# EAGLE board CT_schematic (EAGLE 7.6.0)

Size 100 x 80 mm. Coordinates in mm from the lower left corner, seen from the top.
Outline: 0,0 100,0 100,80 0,80 0,0
Copper layers (1*16): Top 0.035mm / dielectric 1.5mm / Bottom 0.035mm
Design rules "default": minimum track width 10mil, minimum drill 24mil, track to track 8mil, track to pad 8mil, pad to pad 8mil, via to via 8mil, smd to smd 8mil, copper to edge 40mil, drill to drill 8mil, minimum pad ring 10mil, minimum via ring 8mil, stop-mask expansion 4mil, vias tented up to drill 0mil, thermal gap 10mil

## Footprints (pad centres in the part's own frame; a part is rotated, then mirrored left to right if it is on the bottom)
C0603 = smd 0.8 x 0.8: 1 -0.762,0; 2 0.762,0
C0402 = smd 0.5 x 0.5: 1 -0.508,0; 2 0.508,0
C1206 = smd 1.3 x 1.6: 1 -1.524,0; 2 1.524,0
C0805 = smd 1.2 x 1.3: 1 -1.016,0; 2 1.016,0
C1210 = smd 1.2 x 2.5: 1 -1.524,0; 2 1.524,0
EXV-9H = smd 3.505 x 1.676: 1 -2.857,0; 2 2.857,0
L0603 = smd 0.8 x 0.8: 1 -0.762,0; 2 0.762,0
PJ-037B_PACKAGE = drill 3.7 square: 1 12,0 | drill 3.2 square: 2 6,0
R0603 = smd 0.8 x 0.8: 1 -0.762,0; 2 0.762,0
LQFP64 = smd 0.3 x 1.2: 1 -3.75,-5.75; 2 -3.25,-5.75; 3 -2.75,-5.75; 4 -2.25,-5.75; 5 -1.75,-5.75; 6 -1.25,-5.75; 7 -0.75,-5.75; 8 -0.25,-5.75; 9 0.25,-5.75; 10 0.75,-5.75; 11 1.25,-5.75; 12 1.75,-5.75; 13 2.25,-5.75; 14 2.75,-5.75; 15 3.25,-5.75; 16 3.75,-5.75; 33 3.75,5.75; 34 3.25,5.75; 35 2.75,5.75; 36 2.25,5.75; 37 1.75,5.75; 38 1.25,5.75; 39 0.75,5.75; 40 0.25,5.75; 41 -0.25,5.75; 42 -0.75,5.75; 43 -1.25,5.75; 44 -1.75,5.75; 45 -2.25,5.75; 46 -2.75,5.75; 47 -3.25,5.75; 48 -3.75,5.75 | smd 1.2 x 0.3: 17 5.75,-3.75; 18 5.75,-3.25; 19 5.75,-2.75; 20 5.75,-2.25; 21 5.75,-1.75; 22 5.75,-1.25; 23 5.75,-0.75; 24 5.75,-0.25; 25 5.75,0.25; 26 5.75,0.75; 27 5.75,1.25; 28 5.75,1.75; 29 5.75,2.25; 30 5.75,2.75; 31 5.75,3.25; 32 5.75,3.75; 49 -5.75,3.75; 50 -5.75,3.25; 51 -5.75,2.75; 52 -5.75,2.25; 53 -5.75,1.75; 54 -5.75,1.25; 55 -5.75,0.75; 56 -5.75,0.25; 57 -5.75,-0.25; 58 -5.75,-0.75; 59 -5.75,-1.25; 60 -5.75,-1.75; 61 -5.75,-2.25; 62 -5.75,-2.75; 63 -5.75,-3.25; 64 -5.75,-3.75
A2200-A = smd 1.5 x 0.8: 1 -4.85,6.35; 2 -4.85,5.08; 3 -4.85,3.81; 4 -4.85,2.54; 5 -4.85,1.27; 6 -4.85,0; 7 -4.85,-1.27; 8 -4.85,-2.54; 9 -4.85,-3.81; 10 -4.85,-5.08; 11 -4.85,-6.35; 12 4.85,-6.35; 13 4.85,-5.08; 14 4.85,-3.81; 15 4.85,-2.54; 16 4.85,-1.27; 17 4.85,0; 18 4.85,1.27; 19 4.85,2.54; 20 4.85,3.81; 21 4.85,5.08; 22 4.85,6.35 | smd 1.2 x 1.2: 23 -2,2; 24 -2,0; 25 -2,-2; 26 0,-2; 27 0,0; 28 0,2; 29 2,2; 30 2,0; 31 2,-2
COAXIAL_C = smd 1 x 1: 1 0,-1.5; 2 0,1.5 | smd 1.05 x 2.2: 3 -1.475,0; 4 1.475,0
QFN-32 = smd 0.6 x 0.3: 1 -2.3,1.75; 2 -2.3,1.25; 3 -2.3,0.75; 4 -2.3,0.25; 5 -2.3,-0.25; 6 -2.3,-0.75; 7 -2.3,-1.25; 8 -2.3,-1.75; 17 2.3,-1.75; 18 2.3,-1.25; 19 2.3,-0.75; 20 2.3,-0.25; 21 2.3,0.25; 22 2.3,0.75; 23 2.3,1.25; 24 2.3,1.75 | smd 0.3 x 0.6: 9 -1.75,-2.3; 10 -1.25,-2.3; 11 -0.75,-2.3; 12 -0.25,-2.3; 13 0.25,-2.3; 14 0.75,-2.3; 15 1.25,-2.3; 16 1.75,-2.3; 25 1.75,2.3; 26 1.25,2.3; 27 0.75,2.3; 28 0.25,2.3; 29 -0.25,2.3; 30 -0.75,2.3; 31 -1.25,2.3; 32 -1.75,2.3 | smd 3.2 x 3.2: EXP 0,0
SJ-43515TS-SMT-TR = smd 2.2 x 3: 1 0.6,-7.4; 4 3.4,-7.4 | smd 3 x 3: 2 12.8,-7.4; 5 17,-3 | smd 2 x 3: 3 5.3,0; 6 2.5,0 | drill 1.8: P$7 4.5,-3.69; P$8 11.54,-3.69
WM-64PC = drill 0.6 pad 1: 1 -1,0.95; 2 -1,-0.95
MICRO_USB_AB = smd 0.4 x 1.35: 1 1.3,0.26; 2 0.65,0.26; 3 0,0.26; 4 -0.65,0.26; 5 -1.3,0.26 | drill 0.6 pad 0.95 long: 6 4.175,-2.54; 7 -4.175,-2.54 | drill 0.7 pad 1.1 long: 8 -2.225,0.46; 9 2.225,0.46
SOT143B = smd 1 x 0.7: 1 -0.75,-1 | smd 0.6 x 0.7: 2 0.95,-1; 3 0.95,1; 4 -0.95,1
ABS07-32.768KHZ-7-T = smd 1.1 x 2.4: 1 -2.5,0; 2 0,0
ASFL1 = smd 1.7 x 1.5: 1 -1.27,-1.1; 2 1.27,-1.1; 3 1.27,1.1; 4 -1.27,1.1
WSON-8 = smd 0.3 x 0.6: 1 -0.75,0; 2 0.05,0; 3 0.85,0; 4 1.65,0; 5 1.65,3.8; 6 0.85,3.8; 7 0.05,3.8; 8 -0.75,3.8 | smd 3 x 2.6: PAD 0.45,1.9
SON-6 = smd 0.55 x 0.3: 1 -0.355,0.5 | smd 0.52 x 0.3: 2 -0.37,0; 3 -0.37,-0.5; 4 0.37,-0.5; 5 0.37,0; 6 0.37,0.5
SW_4-1437565-2 = smd 1.4 x 2.1: 1 -2.23,4.55; 2 -2.23,-4.55; 3 2.23,4.55; 4 2.23,-4.55
LGM67K-G1J2-24-Z = smd 0.8 x 1.4: A -2,0; C 0,0
NC7SZ125M5X = smd 1.3 x 0.7: 1 -1.3,0.95; 2 -1.3,0; 3 -1.3,-0.95; 4 1.3,-0.95; 5 1.3,0.95

## Placement (x,y rotation side)
C1  1e-07  [C0603]  -38.1,74.93 0 top  (outside the outline)
C2  1e-07  [C0603]  -41.91,74.93 0 top  (outside the outline)
C3  1e-07  [C0603]  -45.72,74.93 0 top  (outside the outline)
C4  1e-07  [C0603]  -49.53,74.93 0 top  (outside the outline)
C5  4.7e-06  [C0603]  -34.29,74.93 0 top  (outside the outline)
C6  1e-07  [C0603]  -53.34,74.93 0 top  (outside the outline)
C7  1e-08  [C0603]  -57.15,74.93 0 top  (outside the outline)
C8  1e-06  [C0603]  -60.96,74.93 0 top  (outside the outline)
C9  1e-11  [C0402]  -76.2,80.01 0 top  (outside the outline)
C10  1e-11  [C0402]  -80.01,80.01 0 top  (outside the outline)
C11  1e-07  [C0402]  -15.24,85.09 0 top  (outside the outline)
C12  1e-06  [C0603]  -64.77,74.93 0 top  (outside the outline)
C13  1e-06  [C0603]  -68.58,74.93 0 top  (outside the outline)
C14  1e-06  [C0603]  -72.39,74.93 0 top  (outside the outline)
C15  1e-06  [C0603]  -76.2,74.93 0 top  (outside the outline)
C16  1e-06  [C0603]  -80.01,74.93 0 top  (outside the outline)
C17  1e-06  [C0603]  -15.24,80.01 0 top  (outside the outline)
C18  1e-06  [C0603]  -19.05,80.01 0 top  (outside the outline)
C19  1e-07  [C0402]  -19.05,85.09 0 top  (outside the outline)
C20  1e-07  [C0402]  -22.86,85.09 0 top  (outside the outline)
C21  1e-07  [C0402]  -26.67,85.09 0 top  (outside the outline)
C22  1e-07  [C0402]  -30.48,85.09 0 top  (outside the outline)
C23  1e-06  [C0603]  -22.86,80.01 0 top  (outside the outline)
C24  1e-08  [C0402]  -34.29,85.09 0 top  (outside the outline)
C25  1e-08  [C0402]  -38.1,85.09 0 top  (outside the outline)
C26  1e-08  [C0402]  -41.91,85.09 0 top  (outside the outline)
C27  1e-05  [C1206]  -35.56,68.58 0 top  (outside the outline)
C28  1e-05  [C0805]  -59.69,68.58 0 top  (outside the outline)
C29  1e-08  [C0402]  -45.72,85.09 0 top  (outside the outline)
C30  1e-05  [C1206]  -41.91,68.58 0 top  (outside the outline)
C31  1e-05  [C1210]  -29.21,68.58 0 top  (outside the outline)
C32  1e-07  [C0402]  -49.53,85.09 0 top  (outside the outline)
C33  0.0001  [EXV-9H]  -45.72,59.69 0 top  (outside the outline)
C34  0.0001  [EXV-9H]  -57.15,59.69 0 top  (outside the outline)
C35  1e-08  [C0402]  -53.34,85.09 0 top  (outside the outline)
C36  1e-08  [C0402]  -57.15,85.09 0 top  (outside the outline)
F1  240.0  [L0603]  -26.67,80.01 0 top  (outside the outline)
J1  PJ-037B  [PJ-037B_PACKAGE]  -55.88,26.67 0 top  (outside the outline)
R2  1000.0  [R0603]  -30.48,80.01 0 top  (outside the outline)
R4  4700.0  [R0603]  -34.29,80.01 0 top  (outside the outline)
R5  4700.0  [R0603]  -38.1,80.01 0 top  (outside the outline)
R6  2200.0  [R0603]  -41.91,80.01 0 top  (outside the outline)
R7  2200.0  [R0603]  -45.72,80.01 0 top  (outside the outline)
R8  10000.0  [R0603]  -15.24,74.93 0 top  (outside the outline)
R9  10000.0  [R0603]  -20.32,74.93 0 top  (outside the outline)
R10  1270.0  [R0603]  -49.53,80.01 0 top  (outside the outline)
R11  1270.0  [R0603]  -53.34,80.01 0 top  (outside the outline)
R12  100000.0  [R0603]  -64.77,67.31 0 top  (outside the outline)
R13  200.0  [R0603]  -57.15,80.01 0 top  (outside the outline)
R14  1000.0  [R0603]  -60.96,80.01 0 top  (outside the outline)
R15  100000.0  [R0603]  -69.85,67.31 0 top  (outside the outline)
R16  2231.0  [R0603]  -64.77,80.01 0 top  (outside the outline)
R17  1000.0  [R0603]  -68.58,80.01 0 top  (outside the outline)
R18  10000.0  [R0603]  -25.4,74.93 0 top  (outside the outline)
R19  10000.0  [R0603]  -30.48,74.93 0 top  (outside the outline)
R20  9100.0  [R0603]  -72.39,80.01 0 top  (outside the outline)
R21  680000.0  [R0603]  -74.93,67.31 0 top  (outside the outline)
R22  120000.0  [R0603]  -80.01,67.31 0 top  (outside the outline)
U1  STM32L152RDT6  [LQFP64]  -68.58,26.67 0 top  (outside the outline)
U2  A2200-A  [A2200-A]  -19.05,10.16 0 top  (outside the outline)
U3  73412-0114  [COAXIAL_C]  -38.1,60.96 0 top  (outside the outline)
U4  SGTL5000XNAA3  [QFN-32]  -66.04,39.37 0 top  (outside the outline)
U5  SJ-43515TS-SMT-TR  [SJ-43515TS-SMT-TR]  -52.07,10.16 0 top  (outside the outline)
U6  SJ-43515TS-SMT-TR  [SJ-43515TS-SMT-TR]  -80.01,10.16 0 top  (outside the outline)
U7  SJ-43515TS-SMT-TR  [SJ-43515TS-SMT-TR]  -39.37,29.21 0 top  (outside the outline)
U8  WM-64PCT  [WM-64PC]  -52.07,39.37 0 top  (outside the outline)
U9  47590-0001  [MICRO_USB_AB]  -20.32,41.91 0 top  (outside the outline)
U10  prtr5v0u2ax  [SOT143B]  -69.85,85.09 0 top  (outside the outline)
U11  ABS07-32.768KHZ-7-T  [ABS07-32.768KHZ-7-T]  -78.74,59.69 0 top  (outside the outline)
U12  ASFL-24.57MHZ-NCS  [ASFL1]  -68.58,50.8 0 top  (outside the outline)
U13  ASFL1-25MHZ-NCS  [ASFL1]  -26.67,60.96 0 top  (outside the outline)
U14  LP3878SDX-ADJ/NOPB  [WSON-8]  -30.48,49.53 0 top  (outside the outline)
U15  LP3878SDX-ADJ/NOPB  [WSON-8]  -50.8,49.53 0 top  (outside the outline)
U16  TPS3895ADRYR  [SON-6]  -73.66,83.82 0 top  (outside the outline)
U17  4-1437565-2  [SW_4-1437565-2]  -40.64,40.64 0 top  (outside the outline)
U18  Q65110A2395  [LGM67K-G1J2-24-Z]  -17.78,68.58 0 top  (outside the outline)
U19  nc7sz125m5x  [NC7SZ125M5X]  -46.99,67.31 0 top  (outside the outline)
U20  nc7sz125m5x  [NC7SZ125M5X]  -53.34,67.31 0 top  (outside the outline)

## Library data of the parts
C1-C36 F1 J1 R2 R4-R22 U1-U20 = circuit_tree

## Nets
CLK_CRYSTAL_U1_3: C9.1 U1.3 U11.1
CLK_CRYSTAL_U1_4: C10.1 U1.4 U11.2
CLK_U1_5: U1.5 U13.3
CLK_U4_21: U4.21 U12.3
GND: C1.2 C2.2 C3.2 C4.2 C5.2 C6.2 C7.2 C8.2 C9.2 C10.2 C11.2 C19.2 C20.2 C21.2 C22.2 C23.2 C24.2 C25.2 C26.2 C27.2 C28.2 C29.2 C30.2 C31.2 C32.2 C33.2 C34.2 C35.2 C36.2 J1.2 R2.2 R8.2 R11.2 R14.2 R17.2 R20.2 R22.2 U1.12 U1.18 U1.31 U1.47 U1.63 U2.7 U2.8 U2.23 U2.24 U2.25 U2.26 U2.27 U2.28 U2.29 U2.30 U2.31 U4.1 U4.3 U4.7 U4.EXP U6.1 U7.1 U8.2 U9.5 U9.6 U9.7 U9.8 U9.9 U10.1 U12.2 U13.2 U14.3 U14.PAD U15.3 U15.PAD U16.2 U18.C U19.1 U19.3 U20.1 U20.3
NET_U1_1: C6.1 U1.1
NET_U1_7: R5.1 U1.7 U20.4
NET_U1_13: C7.1 C8.1 F1.1 U1.13
NET_U1_58: R6.1 U1.58 U2.15
NET_U1_59: R7.1 U1.59 U2.16
NET_U1_60: R8.1 U1.60
NET_U1_61: U18.A
NET_U1_62: U17.3 U17.4
NET_U2_2: R9.2 U2.2
NET_U2_6: U2.6
NET_U2_17: R9.1 U2.17
NET_U2_19: U2.19
NET_U2_22: R4.1 U2.22 U19.4
NET_U3_1: U2.11 U3.1
NET_U3_2: U2.10 U3.2 U3.3 U3.4
NET_U4_10: C22.1 U4.10
NET_U4_29: R10.1 U4.29
NET_U4_31: R11.1 U4.31
NET_U5_1: U4.4 U5.1
NET_U5_2: U4.2 U5.2
NET_U5_5: U4.6 U5.5
NET_U6_2: C13.1 U6.2
NET_U6_5: C12.1 U6.5
NET_U6_11: C13.2
NET_U6_12: C12.2
NET_U7_2: C15.1 C16.1 U7.2
NET_U7_5: C14.1 U7.5
NET_U7_13: C15.2 C16.2
NET_U7_14: C14.2
NET_U8_1: C17.1 C18.1 C23.1 U4.16 U8.1
NET_U8_15: C17.2 C18.2
NET_U10_4: U9.1 U10.4
NET_U14_1: C26.1 U14.1
NET_U14_6: R13.2 R14.1 U14.6
NET_U14_8: R12.1 U14.8
NET_U15_1: C29.1 U15.1
NET_U15_6: R16.2 R17.1 U15.6
NET_U15_8: R15.1 U15.8
NET_U16_1: R19.1 R20.1 U16.1
NET_U16_3: R21.2 R22.1 U16.3
NET_U16_4: R18.1 U16.4 U19.2 U20.2
NET_U17_1: R2.1 U17.1 U17.2
PROC_I2S2_CK: U1.34 U4.24
PROC_I2S2_SD: U1.36 U4.26
PROC_I2S2_WS: U1.33 U4.23
PROC_USB_DM: U1.44 U9.2 U10.3
PROC_USB_DP: U1.45 U9.3 U10.2
VCC_S1_8V6: C27.1 C30.1 C33.1 C34.1 J1.1 R12.2 R15.2 U14.4 U15.4
VCC_TIER1_1V2: C19.1 C28.1 R13.1 U4.30 U14.5
VCC_TIER1_3V3: C1.1 C2.1 C3.1 C4.1 C5.1 C11.1 C20.1 C21.1 C24.1 C25.1 C31.1 C32.1 C35.1 C36.1 F1.2 R4.2 R5.2 R6.2 R7.2 R10.2 R16.1 R18.2 R19.2 R21.1 U1.19 U1.32 U1.48 U1.64 U2.20 U4.5 U4.20 U12.4 U13.4 U15.5 U16.6 U19.5 U20.5

## Tracks (layer width: path | path; a pad name or v marks a point on that pad's centre or on a via)
CLK_CRYSTAL_U1_3  (2 unrouted)
CLK_CRYSTAL_U1_4  (2 unrouted)
CLK_U1_5  (1 unrouted)
CLK_U4_21  (1 unrouted)
GND  (77 unrouted)
NET_U1_1  (1 unrouted)
NET_U1_7  (2 unrouted)
NET_U1_13  (3 unrouted)
NET_U1_58  (2 unrouted)
NET_U1_59  (2 unrouted)
NET_U1_60  (1 unrouted)
NET_U1_62  (1 unrouted)
NET_U2_2  (1 unrouted)
NET_U2_17  (1 unrouted)
NET_U2_22  (2 unrouted)
NET_U3_1  (1 unrouted)
NET_U3_2  (3 unrouted)
NET_U4_10  (1 unrouted)
NET_U4_29  (1 unrouted)
NET_U4_31  (1 unrouted)
NET_U5_1  (1 unrouted)
NET_U5_2  (1 unrouted)
NET_U5_5  (1 unrouted)
NET_U6_2  (1 unrouted)
NET_U6_5  (1 unrouted)
NET_U7_2  (2 unrouted)
NET_U7_5  (1 unrouted)
NET_U7_13  (1 unrouted)
NET_U8_1  (4 unrouted)
NET_U8_15  (1 unrouted)
NET_U10_4  (1 unrouted)
NET_U14_1  (1 unrouted)
NET_U14_6  (2 unrouted)
NET_U14_8  (1 unrouted)
NET_U15_1  (1 unrouted)
NET_U15_6  (2 unrouted)
NET_U15_8  (1 unrouted)
NET_U16_1  (2 unrouted)
NET_U16_3  (2 unrouted)
NET_U16_4  (3 unrouted)
NET_U17_1  (2 unrouted)
PROC_I2S2_CK  (1 unrouted)
PROC_I2S2_SD  (1 unrouted)
PROC_I2S2_WS  (1 unrouted)
PROC_USB_DM  (2 unrouted)
PROC_USB_DP  (2 unrouted)
VCC_S1_8V6  (8 unrouted)
VCC_TIER1_1V2  (4 unrouted)
VCC_TIER1_3V3  (36 unrouted)